# Altium PCB 0011_ESP32_PSU.PcbDoc
Units mil, origin at the board's own origin, x right, y up, seen from the top; angles counter-clockwise.
Board outline 3000 x 3100 mil, 4 copper layers (Top Layer, Signal Layer 1, Signal Layer 2, Bottom Layer), stack 64.6 mil thick; 42 components, 42 nets, 191 pads, 336 vias.
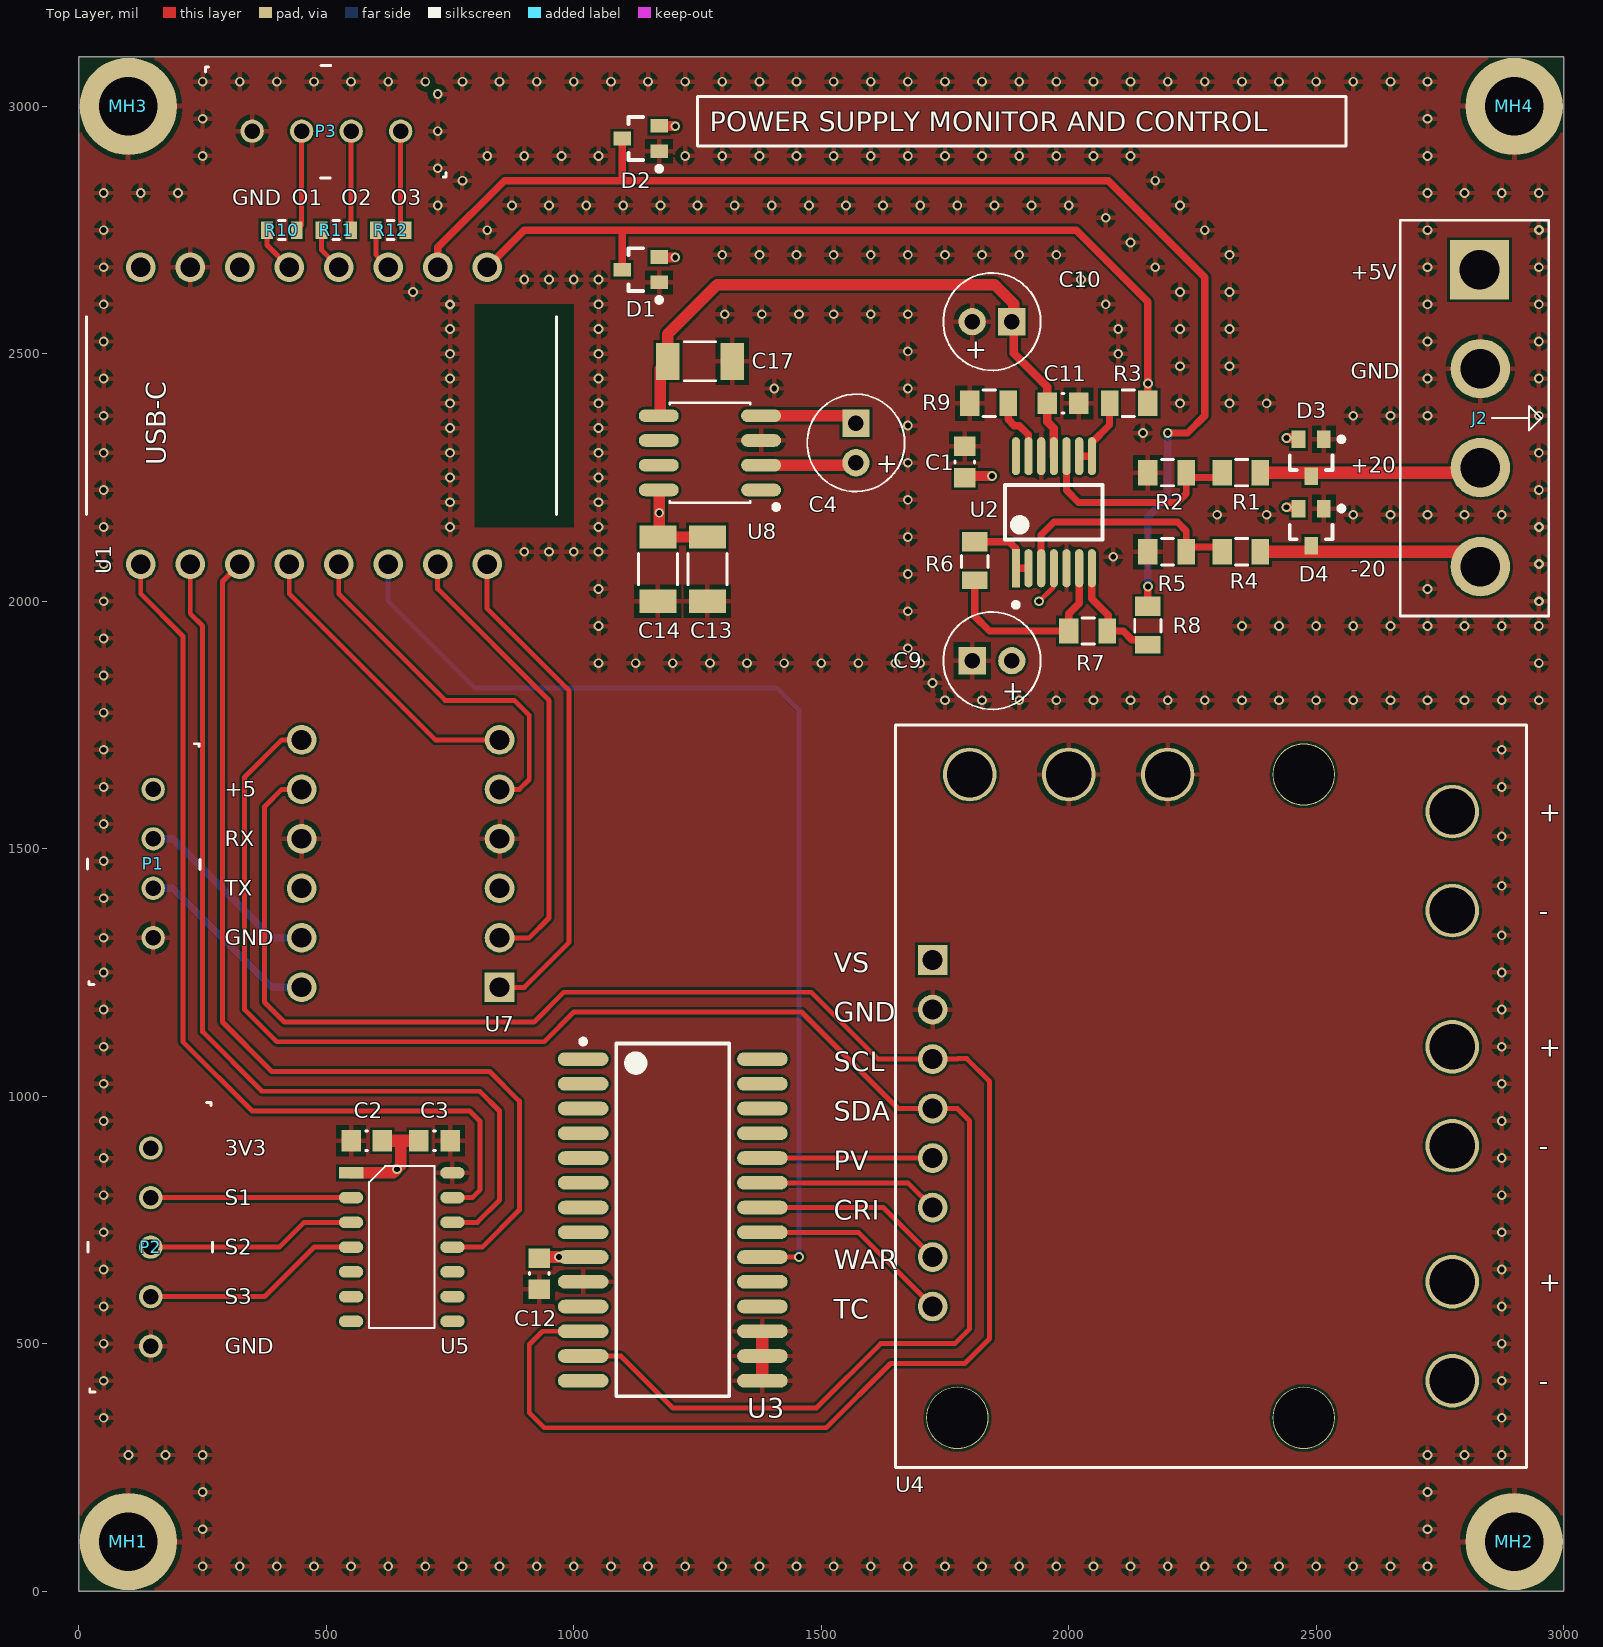
[diagram p0: Top Layer view]
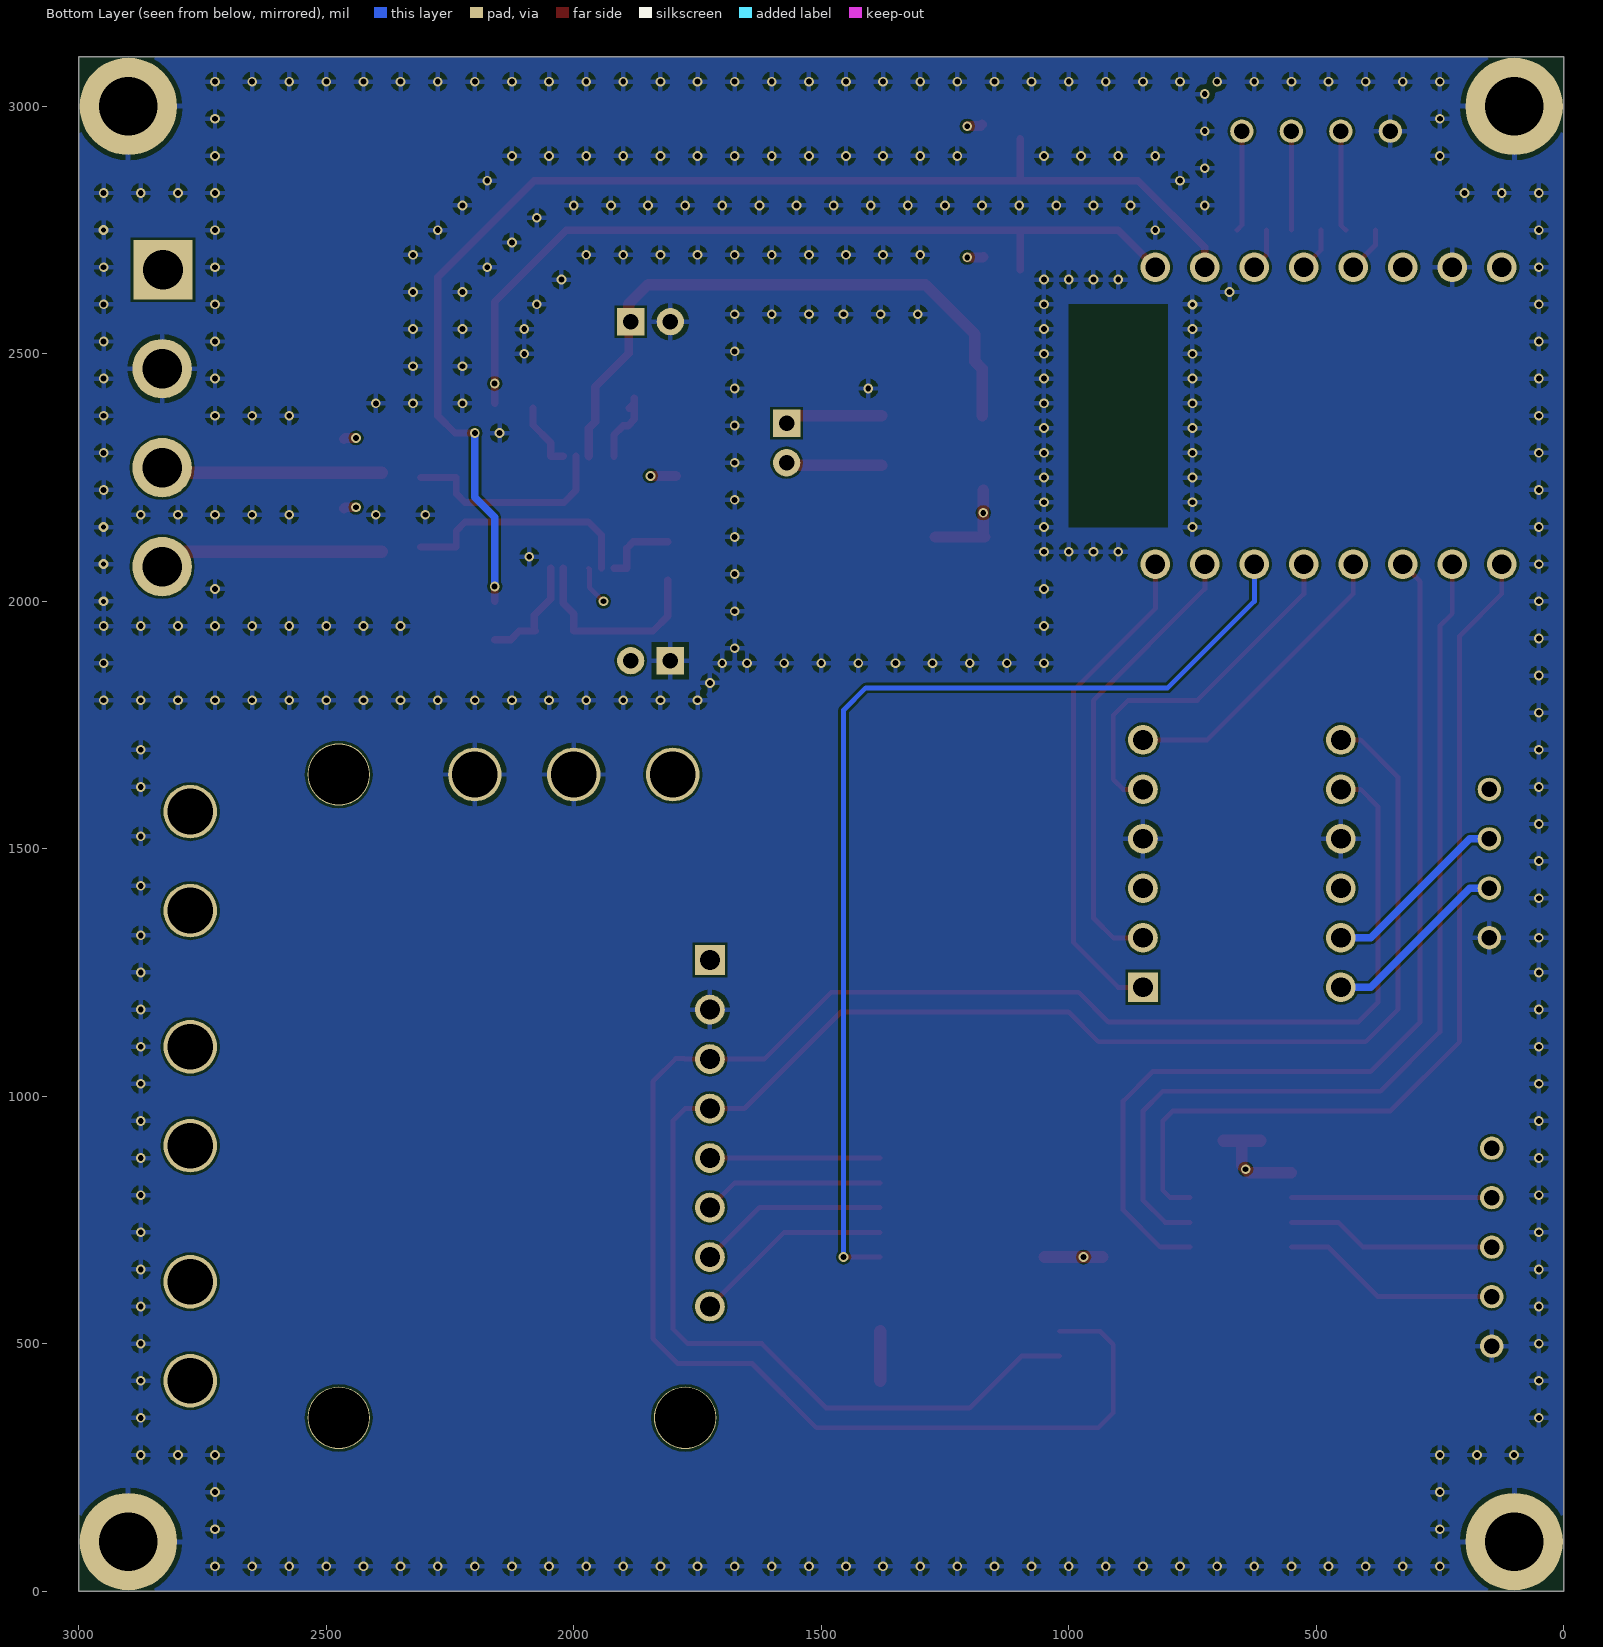
[diagram p1: Bottom Layer view, seen from below]
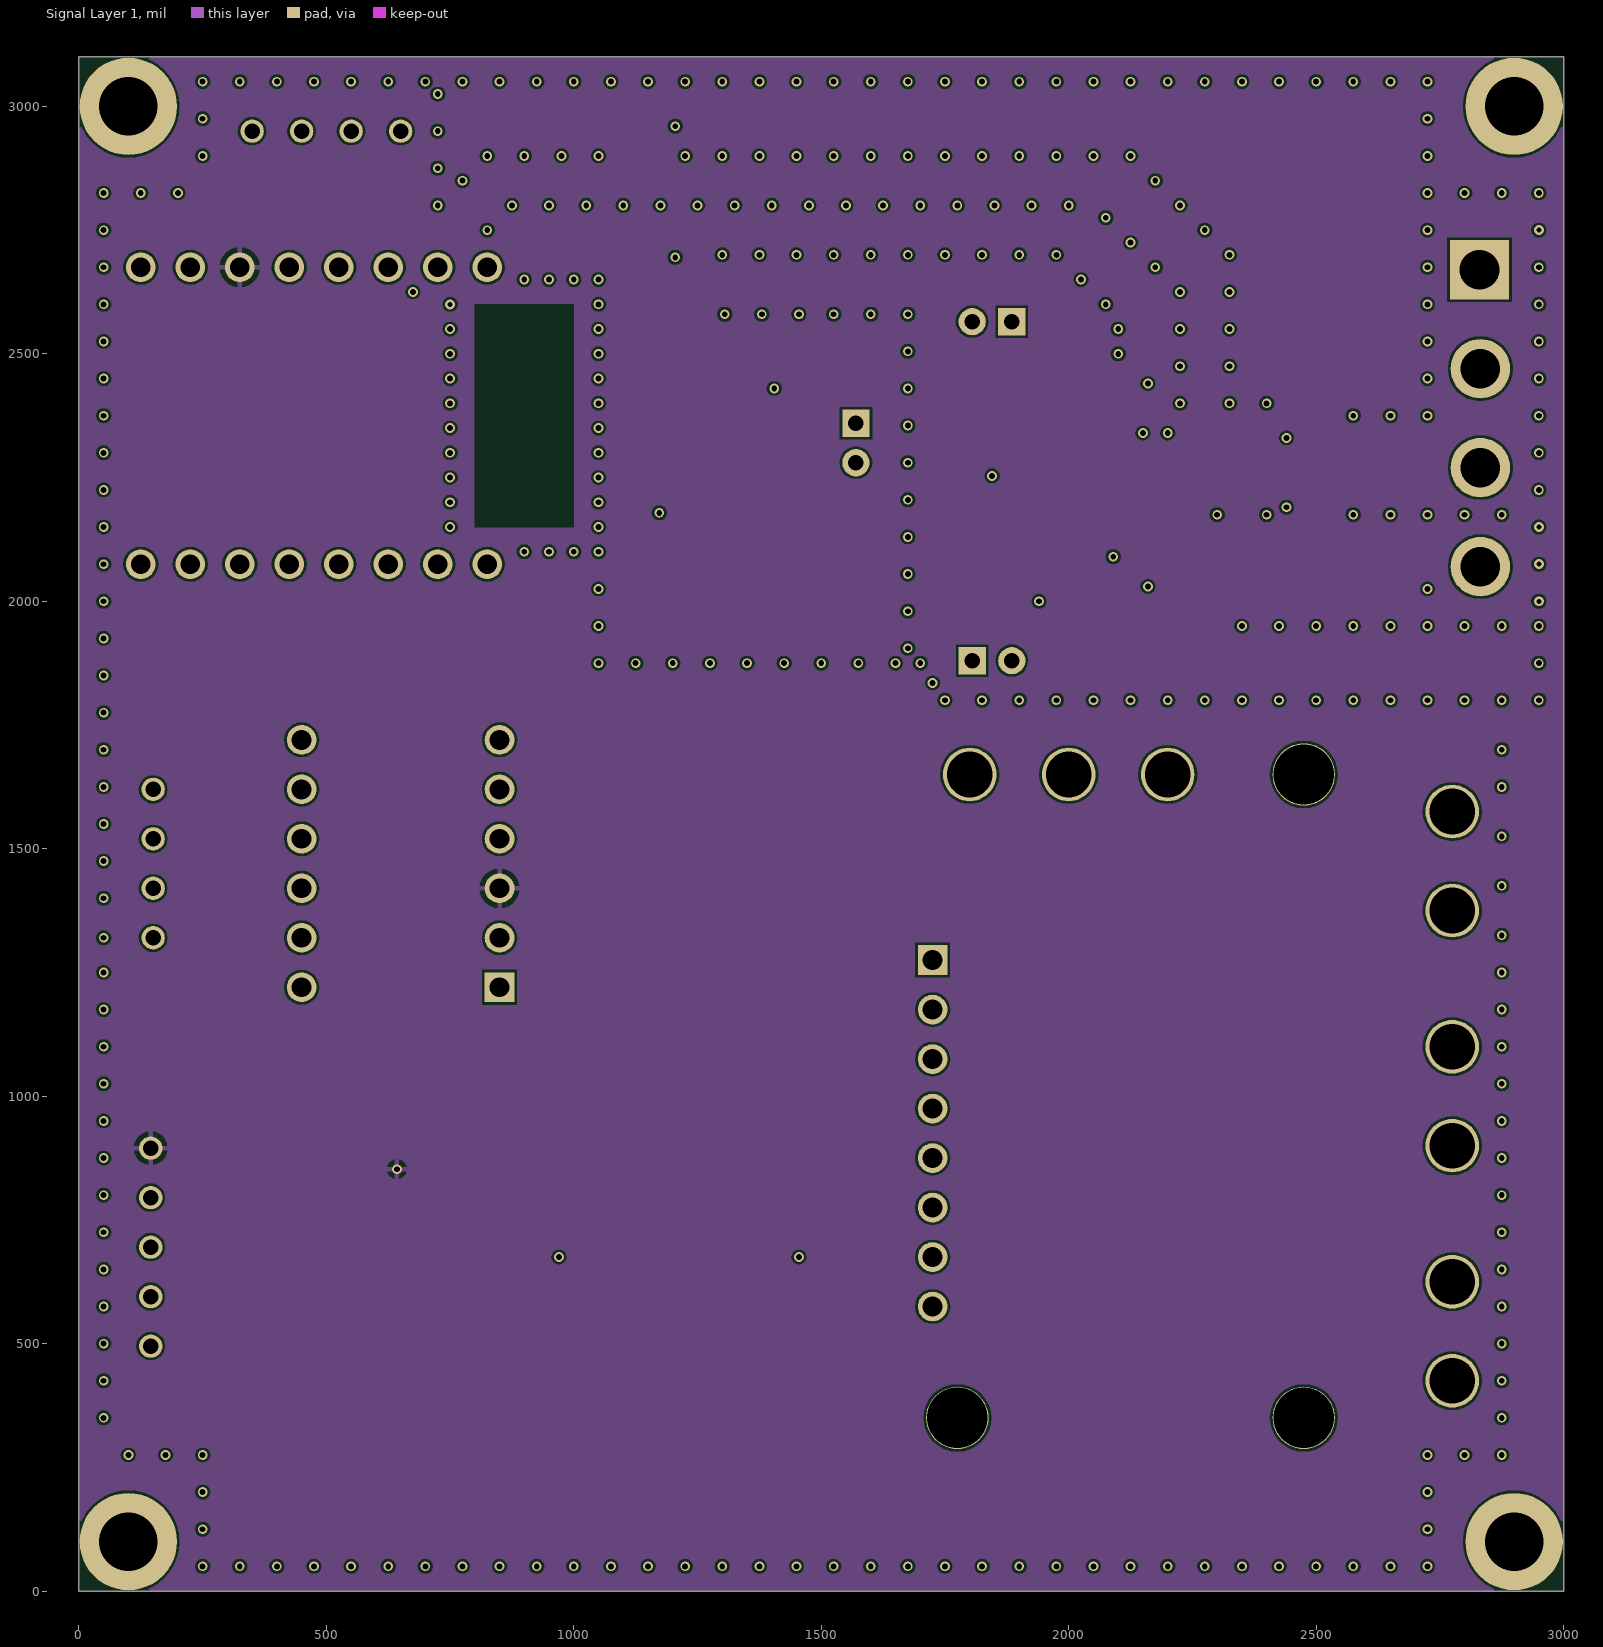
[diagram p2: Signal Layer 1]
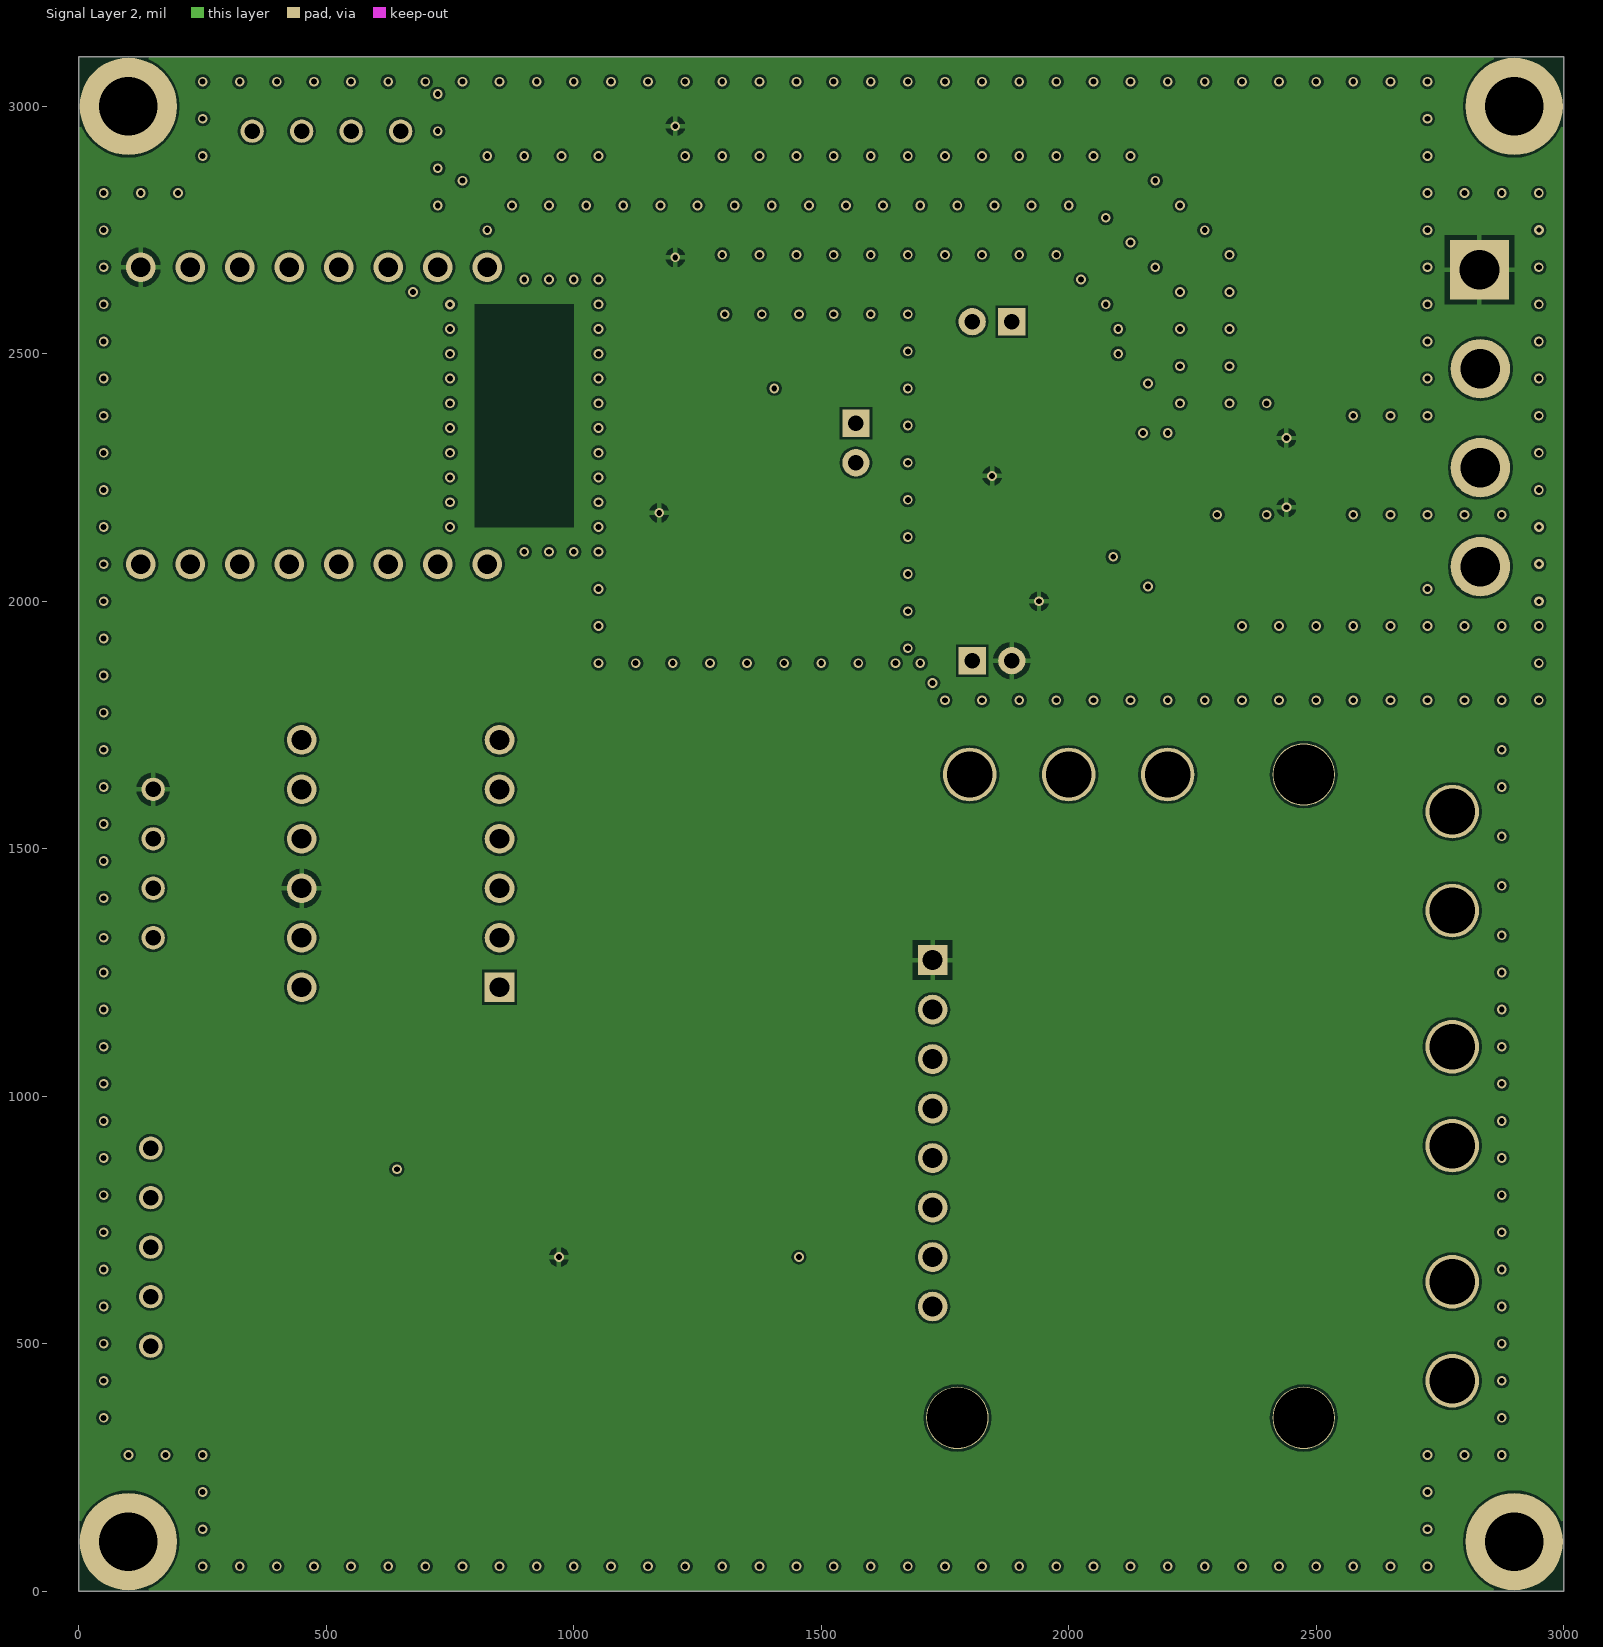
[diagram p3: Signal Layer 2]
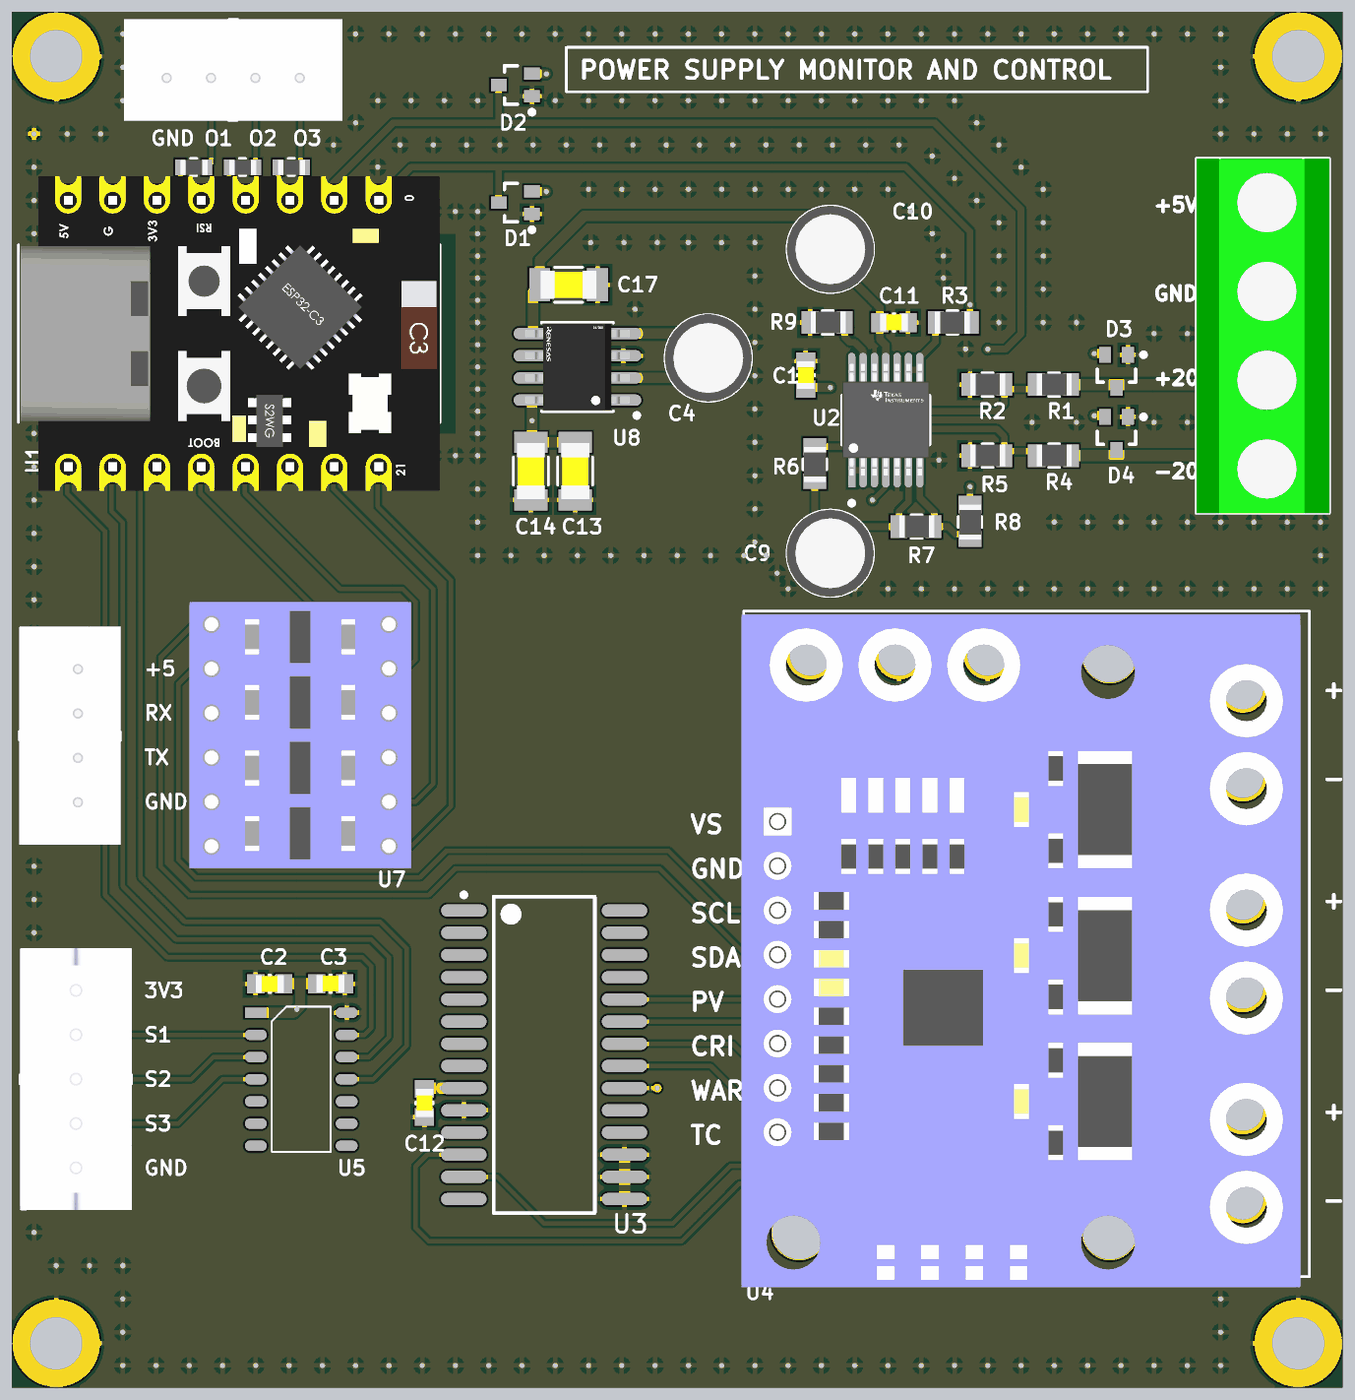
[diagram p4: 3D render of the assembled board from above, using the file's embedded part models]

## Layer stack, top to bottom
Top Solder: solder mask 1, Solder Resist, Dk 3.5
Top Layer: signal copper 1.4
Dielectric 1: prepreg 6.7, FR-4, Dk 4.2
Signal Layer 1: signal copper 0.7
Dielectric 2: core 47, FR-4, Dk 4.2
Signal Layer 2: signal copper 0.7
Dielectric 3: prepreg 6.7, FR-4, Dk 4.2
Bottom Layer: signal copper 1.4
Bottom Solder: solder mask 1, Solder Resist, Dk 3.5

## Board outline
0,0 3000,0 3000,3100 0,3100

## Design rules (kind name [scope] priority, off if disabled: settings)
AssemblyTestPointUsage AssemblyTestPointUsage_1 [All] p2:
AssemblyTestpoint AssemblyTestpoint_1 [All] p2: testpointundercomponent=TRUE minsize=40 maxsize=100 preferedsize=60 minholesize=0 maxholesize=40 preferedholesize=32 testpointgrid=1 usegrid=TRUE gridtolerance=0.01 allowsidetop=TRUE allowsidebottom=TRUE
Clearance [All] p1: gap=5 ignorepadtopadclearanceinfootprint=FALSE
Clearance Clearance_1 [All] p2: gap=5 ignorepadtopadclearanceinfootprint=FALSE except(0: Arc-Hole Track-Hole SMDPad-Hole THPad-Hole Via-Hole Fill-Hole Poly-Hole Region-Hole Text-Hole)
ComponentClearance ComponentClearance_1 [All] p2: gap=10 collisioncheckmode=3 verticalgap=10 showdistances=FALSE
DiffPairsRouting DiffPairsRouting_1 [All] p2: maxlimit=10 minlimit=10 mostfreqgap=10 toplayer_minwidth=15 toplayer_maxwidth=15 toplayer_prefwidth=15 midlayer1_minwidth=15 midlayer1_maxwidth=15 midlayer1_prefwidth=15 midlayer2_minwidth=15 midlayer2_maxwidth=15 midlayer2_prefwidth=15 bottomlayer_minwidth=15 bottomlayer_maxwidth=15 bottomlayer_prefwidth=15 maxuncoupledlength=500
FabricationTestPointUsage FabricationTestPointUsage_1 [All] p2: valid=0 allowmultiple=FALSE
FabricationTestpoint FabricationTestpoint_1 [All] p2: side=3 testpointundercomponent=TRUE minsize=40 maxsize=100 preferedsize=60 minholesize=0 maxholesize=40 preferedholesize=32 testpointgrid=1 allowsidetop=TRUE allowsidebottom=TRUE usegrid=TRUE gridtolerance=0.01
FanoutControl Fanout_LCC [IsLCC] p1: bgadir=Out bgaviamode=Centered fanoutstyle=Auto fanoutdirection=Alternating viagrid=1 // Fanout_LCC (Default Rule)
FanoutControl Fanout_BGA [IsBGA] p2: bgadir=Out bgaviamode=Centered fanoutstyle=Auto fanoutdirection=Alternating viagrid=1 // Fanout_BGA (Default Rule)
FanoutControl Fanout_Default [All] p4: bgadir=Out bgaviamode=Centered fanoutstyle=Auto fanoutdirection=Alternating viagrid=1 // Fanout_Default (Default Rule)
FanoutControl Fanout_Small [(CompPinCount < 5)] p5: bgadir=Out bgaviamode=Centered fanoutstyle=Auto fanoutdirection=OutThenIn viagrid=1 // Fanout_Small (Default Rule)
FanoutControl Fanout_BGA_1 [IsBGA] p6: bgadir=Out bgaviamode=Centered fanoutstyle=Auto fanoutdirection=Alternating viagrid=1 // Fanout_BGA (Default Rule)
FanoutControl Fanout_LCC_1 [IsLCC] p7: bgadir=Out bgaviamode=Centered fanoutstyle=Auto fanoutdirection=Alternating viagrid=1 // Fanout_LCC (Default Rule)
FanoutControl Fanout_SOIC_1 [IsSOIC] p8: bgadir=Out bgaviamode=Centered fanoutstyle=Auto fanoutdirection=Alternating viagrid=1 // Fanout_SOIC (Default Rule)
FanoutControl Fanout_Small_1 [(CompPinCount < 5)] p9: bgadir=Out bgaviamode=Centered fanoutstyle=Auto fanoutdirection=OutThenIn viagrid=1 // Fanout_Small (Default Rule)
FanoutControl Fanout_Default_1 [All] p10: bgadir=Out bgaviamode=Centered fanoutstyle=Auto fanoutdirection=Alternating viagrid=1 // Fanout_Default (Default Rule)
Height Height_1 [All] p2: minheight=0 maxheight=1000 prefheight=500
HoleSize HoleSize_1 [All] p2: absolutevalues=TRUE maxlimit=500 minlimit=1 maxpercent=80.000 minpercent=20.000
HoleToHoleClearance HoleToHoleClearance_1 [All] p2: gap=10 allowstackedmicrovias=TRUE
LayerPairs LayerPairs_1 [All] p2: enforce=TRUE
MinimumSolderMaskSliver MinimumSolderMaskSliver_1 [All] p2: minsoldermaskwidth=4
NetAntennae NetAntennae_1 [All] p2: netantennaetolerance=0
PasteMaskExpansion PasteMaskExpansion_1 [All] p2: expansion=0
PlaneClearance PlaneClearance_1 [All] p2: clearance=20
PlaneConnect PlaneConnect_1 [All] p2: planeconnectstyle=Relief reliefexpansion=20 reliefentries=4 reliefconductorwidth=10 reliefairgap=10
PolygonConnect [All] p1: connectstyle=Relief reliefconductorwidth=10 reliefentries=4 polygonreliefangle="90 Angle" airgapwidth=10
PolygonConnect PolygonConnect_1 [All] p2: connectstyle=Relief reliefconductorwidth=10 reliefentries=4 polygonreliefangle="90 Angle" airgapwidth=10
RoutingCorners RoutingCorners_1 [All] p2: cornerstyle=45-Degree minsetback=100 maxsetback=100
RoutingLayers RoutingLayers_1 [All] p2: top layer_v5=TRUE mid layer 1_v5=TRUE mid layer 2_v5=TRUE bottom layer_v5=TRUE
RoutingPriority RoutingPriority_1 [All] p2: routingpriority=0
RoutingTopology RoutingTopology_1 [All] p2: topology=Shortest
RoutingVias [All] p1: holewidth=28 width=50 viastyle="Through Hole" minholewidth=28 minwidth=50 maxholewidth=28 maxwidth=50
RoutingVias RoutingVias_1 [All] p2: holewidth=28 width=50 viastyle="Through Hole" minholewidth=5 minwidth=10 maxholewidth=28 maxwidth=50
ShortCircuit ShortCircuit_1 [All] p2: allowed=FALSE
SilkToBoardRegionClearance SilkToBoardRegionClearance_1 [All] p2:
SilkToSilkClearance SilkToSilkClearance_1 [All] p2: silktosilkclearance=5
SilkToSolderMaskClearance SilkToSolderMaskClearance_1 [IsPad] p2: minsilkscreentomaskgap=4 clearancetoexposedcopper=TRUE
SolderMaskExpansion [All] p1: expansion=4 istentingtop=FALSE
SolderMaskExpansion SolderMaskExpansion_1 [All] p2: expansion=4 istentingtop=FALSE
UnRoutedNet UnRoutedNet_1 [All] p2:
UnpouredPolygon UnpouredPolygon_1 [All] p2:
Width [All] p1: maxlimit=50 minlimit=10 preferedwidth=25
Width Width_1 [All] p2: maxlimit=50 minlimit=5 preferedwidth=25
26 further rules are at their usual default settings.

## Components (designator, comment, footprint, x,y, rotation, side; value= is the part's Value field where it differs from the comment)
C1 "Cap" CAP_0603 1790,2312.99 r270 top value=0.1uF
C2 "Cap" CAP_0603 550,910 r0 top value=0.1uF
C3 "Cap" CAP_0603 750,910 r180 top value=0.001uF
C4 "Cap Pol2" "CAP 2MM LEAD 5MM CAN" 1570,2320 r270 top value=10uF
C9 "Cap Pol2" "CAP 2MM LEAD 5MM CAN" 1845,1880 r0 top value=10uF
C10 "Cap Pol2" "CAP 2MM LEAD 5MM CAN" 1845,2565 r180 top value=10uF
C11 "Cap" CAP_0603 2020,2400 r180 top value=0.1uF
C12 "Cap" CAP_0603 930,610 r90 top value=0.1uF
C13 "Cap" CAP_0805 1270,2000 r90 top value=0.1uF
C14 "Cap" CAP_0805 1170,2000 r90 top value=10uF
C17 "Cap" CAP_0805 1320,2485 r180 top value=10uF
D1 "BAT54SWT1" ONSC-SOT-323-3-419-04_V 1135,2670 r180 top
D2 "BAT54SWT1" ONSC-SOT-323-3-419-04_V 1135,2935 r180 top
D3 "BAT54SWT1" ONSC-SOT-323-3-419-04_V 2490,2290 r270 top
D4 "BAT54SWT1" ONSC-SOT-323-3-419-04_V 2490,2150 r270 top
J2 "HEADER, 5.08mm, 4-WAY, SIL" "5.08MM, 4-WAY HEADER" 2830,2670 r0 top
MH1 "MTG HOLE" "3mm hole 5mm ring" 100,100 r180 top
MH2 "MTG HOLE" "3mm hole 5mm ring" 2900,100 r180 top
MH3 "MTG HOLE" "3mm hole 5mm ring" 100,3000 r180 top
MH4 "MTG HOLE" "3mm hole 5mm ring" 2900,3000 r180 top
P1 "JST 4-WAY" "JST 4-WAY" 150,1620 r0 top
P2 "JST 5-WAY" "JST 5-WAY" 145,895 r0 top
P3 "JST 4-WAY" "JST 4-WAY" 650,2950 r270 top
R1 "Res1" RESISTOR_0805 2350,2260 r0 top value=330KΩ
R2 "Res1" RESISTOR_0805 2200,2260 r0 top value=68KΩ
R3 "Res1" RESISTOR_0805 2120,2400 r180 top value=1KΩ
R4 "Res1" RESISTOR_0805 2350,2100 r0 top value=330KΩ
R5 "Res1" RESISTOR_0805 2200,2100 r0 top value=68KΩ
R6 "Res1" RESISTOR_0805 1810,2080 r270 top value=10KΩ
R7 "Res1" RESISTOR_0805 2040,1940 r0 top value=10KΩ
R8 "Res1" RESISTOR_0805 2160,1950 r270 top value=1KΩ
R9 "Res1" RESISTOR_0805 1840,2400 r0 top value=10KΩ
R10 "Res1" RESISTOR_0603 410,2750 r0 top value=1KΩ
R11 "Res1" RESISTOR_0603 520,2750 r0 top value=1KΩ
R12 "Res1" RESISTOR_0603 630,2750 r0 top value=1KΩ
U1 "ESP32-C3-SUPERMINI" ESP32-C3-SUPERMINI 125,2075 r90 top locked
U2 "LM324PW" FP-PW0014A-IPC_A 1970,2180 r90 top
U3 "MCP23017-E/SO" SOIC-SO28_M 1200,750 r0 top
U4 "INA3221 DEV" INA3221_DEV 1725,1275 r0 top
U5 "LS19-S" SOP14 550,845 r0 top
U7 "LEVEL SHIFTER" "LEVEL SHIFTER, 4-WAY" 850,1220 r180 top
U8 "ICL7660SIBAZT" SOIC127P600X175-8_M8_15_M 1275,2300 r180 top

## Footprints (in the part's own frame and the unit in brackets; to place one, negate y for a bottom-side part, rotate by r counter-clockwise, add the part's x,y. Pads: shape width x height; smd on the part's side, far side on the other; paste and mask are expansions set on the pad)
"3mm hole 5mm ring" [mm] "mounting hole"
  round 5 hole 3: 0(0,0)
"5.08MM, 4-WAY HEADER" [mil]
  rect 120x120 hole 80: 1(0,0)
  round 120 hole 80: 2(1.76,-200) 3(1.76,-400) 4(1.76,-600)
  silkscreen extent -160,-700 140,100, body extent -159,-700 140,100, height 392
"CAP 2MM LEAD 5MM CAN" [mm]
  round 1.4 hole 0.8: 1(1.016,0)
  rect 1.4x1.4 hole 0.8: 2(-1.016,0)
  silkscreen extent -2.5,-2.5 2.5,2.5, body extent -2.51,-2.5 2.5,2.5, height 8
CAP_0603 [mm]
  rect 1x1.1 smd: 1(0,0) 2(1.6,0)
  silkscreen extent 0.75,-0.5 0.85,0.5, body extent 0,-0.51 1.6,0.49, height 0.75
CAP_0805 [mm]
  rect 1.2x1.9 smd: 1(0,0) 2(3.302,0)
  silkscreen extent 0.85,-1 2.45,1, body extent 0.05,-0.8 3.25,0.8, height 1.75
ESP32-C3-SUPERMINI [mil] "ESP32-C3-SUPERMINI"
  round 60 hole 40: 1(0,0) 2(0,-100) 3(0,-200) 4(0,-300) 5(0,-400) 6(0,-500) 7(0,-600) 8(0,-700) 9(600,-700) 10(600,-600) 11(600,-500) 12(600,-400) 13(600,-300) 14(600,-200) 15(600,-100) 16(600,0)
  silkscreen extent 100,-840 500,110, body extent -54,-840 654,105, height 261
FP-PW0014A-IPC_A [mm]
  rect 1.955x0.421 smd paste+0 mask+0: 1(-2.875,1.95)
  rrect100% 1.955x0.421 smd paste+0 mask+0: 2(-2.875,1.3) 3(-2.875,0.65) 4(-2.875,0) 5(-2.875,-0.65) 6(-2.875,-1.3) 7(-2.875,-1.95) 8(2.875,-1.95) 9(2.875,-1.3) 10(2.875,-0.65) 11(2.875,0) 12(2.875,0.65) 13(2.875,1.3) 14(2.875,1.95)
  silkscreen extent -4.88,-2.5 1.4,2.5, body extent -3.18,-2.5 3.22,2.5, height 1.2
INA3221_DEV [mm] "DEV_BOARD_INA3221"
  rect 1.524x1.524 hole 1.016: 1(0,0)
  round 1.524 hole 1.016: 2(0,-2.54) 3(0,-5.08) 4(0,-7.62) 5(0,-10.16) 6(0,-12.7) 7(0,-15.24) 8(0,-17.78)
  round 2.75 hole 2.35: 9(1.905,9.525) 10(6.985,9.525) 11(12.065,9.525) 12(26.67,7.62) 13(26.67,2.54) 14(26.67,-4.445) 15(26.67,-9.525) 16(26.67,-16.51) 17(26.67,-21.59)
  round 3.2 hole 3.1: 18(19.05,9.525) 19(19.05,-23.495) 20(1.27,-23.495)
  silkscreen extent -1.91,-26.04 30.48,12.06, body extent -2.03,-26.63 29.97,11.87, height 6.17
"JST 4-WAY" [mm]
  round 1.2 hole 0.8: 1(0,0) 2(0,-2.54) 3(0,-5.08) 4(0,-7.62)
  silkscreen extent -3.38,-10.01 2.4,2.34, body extent -3.38,-10.08 2.42,2.42, height 7
"JST 5-WAY" [mm]
  round 1.2 hole 0.8: 1(0,0) 2(0,-2.54) 3(0,-5.08) 4(0,-7.62) 5(0,-10.16)
  silkscreen extent -3.22,-12.5 3.17,2.34, body extent -3.21,-12.57 3.19,2.43, height 8.8
"LEVEL SHIFTER, 4-WAY" [mil] "LEVEL SHIFTER, 4-WAY, 12-PIN DIL"
  rect 60x60 hole 40: 1(0,0)
  round 60 hole 40: 2(0,-100) 3(0,-200) 4(0,-300) 5(0,-400) 6(0,-500) 7(400,-500) 8(400,-400) 9(400,-300) 10(400,-200) 11(400,-100) 12(400,0)
  body extent -50,-550 450,50, height 218
ONSC-SOT-323-3-419-04_V [mm] "SOT23, 3-Leads, Body 2x1.25mm, Pitch 0.65mm"
  rect 0.9x0.7 smd: 1(-0.95,0.65) 2(-0.95,-0.65) 3(0.95,0)
  silkscreen extent -1.08,-1.1 0.63,1.67, body extent -0.63,-1 0.63,1, height 1
RESISTOR_0603 [mm]
  rect 0.6x0.9 smd: 1(-0.762,0) 2(0.762,0)
  silkscreen extent -0.18,-0.48 0.18,0.5, body extent -0.76,-0.44 0.79,0.41, height 0.45
RESISTOR_0805 [mm]
  rect 1x1.3 smd: 1(-1.016,0)
  rect 0.9x1.3 smd: 2(0.953,0)
  silkscreen extent -0.33,-0.68 0.3,0.67, body extent -1,-0.62 1,0.64, height 0.45
SOIC127P600X175-8_M8_15_M [mm] "SOIC, 8-Leads, Body 4.90x3.90mm, Pitch 1.27mm, IPC Low Density"
  rrect100% 2.05x0.65 smd: 1(-2.625,1.905) 2(-2.625,0.635) 3(-2.625,-0.635) 4(-2.625,-1.905) 5(2.625,-1.905) 6(2.625,-0.635) 7(2.625,0.635) 8(2.625,1.905)
  silkscreen extent -3.53,-2.56 2.06,2.9, body extent -3,-2.45 3,2.45, height 1.75
SOIC-SO28_M [mm] "SOIC, 28-Leads, Body 17.9x7.5mm, Pitch 1.27mm, IPC Low Density"
  oval 2.6x0.7 smd: 1(-4.6,8.255) 2(-4.6,6.985) 3(-4.6,5.715) 4(-4.6,4.445) 5(-4.6,3.175) 6(-4.6,1.905) 7(-4.6,0.635) 8(-4.6,-0.635) 9(-4.6,-1.905) 10(-4.6,-3.175) 11(-4.6,-4.445) 12(-4.6,-5.715) 13(-4.6,-6.985) 14(-4.6,-8.255) 15(4.6,-8.255) 16(4.6,-6.985) 17(4.6,-5.715) 18(4.6,-4.445) 19(4.6,-3.175) 20(4.6,-1.905) 21(4.6,-0.635) 22(4.6,0.635) 23(4.6,1.905) 24(4.6,3.175) 25(4.6,4.445) 26(4.6,5.715) 27(4.6,6.985) 28(4.6,8.255)
  silkscreen extent -4.72,-9.05 2.9,9.28, body extent -3.8,-9.05 3.8,9.05, height 2.65
SOP14 [mm] "SOP14"
  rect 1.25x0.6 smd: 1(0,0)
  oval 1.25x0.6 smd: 2(0,-1.27) 3(0,-2.54) 4(0,-3.81) 5(0,-5.08) 6(0,-6.35) 7(0,-7.62) 8(5.2,-7.62) 9(5.2,-6.35) 10(5.2,-5.08) 11(5.2,-3.81) 12(5.2,-2.54) 13(5.2,-1.27) 14(5.2,0)
  silkscreen extent 0.92,-7.97 4.29,0.35

## Part data
C1 C2 C3 C11 C12 C13 C14 C17: library part "CAP SMD STD", "CAPACITOR, SMD"
C4 C9 C10: library part "CAP 2mm LEAD 5mm CAN", "CAPACITOR, TH, 5MM"
D1 D2 D3 D4: library part CMP-1055-00560-1, "Dual Series Schottky Barrier Diodes, 3-Pin SOT-323, Tape and Reel", Manufacturer="On Semiconductor", ComponentLink1Description="Manufacturer URL", ComponentLink1URL=http://www.onsemi.com/, ComponentLink2Description=Datasheet, ComponentLink2URL=http://www.onsemi.cn/pub_link/Collateral/BAT54SWT1-D.PDF, ComponentLink3Description="Package Specification", ComponentLink3URL=http://www.onsemi.com/pub_link/Collateral/419-04.PDF, Configuration=Dual, DatasheetVersion="Rev. 10", IFSM Max (A)=0.6, Mounting Technology="Surface Mount", PackageDescription="3-Pin Small Outline Transistor, Body 2 x 1.25 mm, Pitch 0.65 mm", PackageReference=SOT-323-3-419-04, PackageVersion="Rev. N, 11/2008", Packing="Tape and Reel", PartNumber=BAT54SWT1, RoHS=FALSE, trr Max (ns)=5
J2: "HEADER, 5.08mm PITCH TH, 4-WAY"
MH1 MH2 MH3 MH4: library part "MOUNTING HOLE", "PAD, 3mm TH, 5mm RING"
P1 P3: library part "HEADER, JST-H, 4-WAY", "HEADER, JST, 4-WAY, 2.54mm TH"
P2: library part "HEADER, JST-H, 5-WAY", "HEADER, JST, 5-WAY, 2.54mm TH"
R1 R2 R3 R4 R5 R6 R7 R8 R9 R10 R11 R12: library part "RESISTOR, SMD, STANDARD", "RESISTOR, SMD, STD SIZES"
U1: library part "ESP32-C2 SUPER MINI", "DEV MODULE, ESP32-C3-SUPER MINI"
U2: library part CMP-04895-000008-1, "IC OPAMP GP 4 CIRCUIT 14TSSOP", Ambient Temperature Range High=+70°C, Ambient Temperature Range Low=0°C, Input Bias Current=-0.02uA, Input Offset Voltage=3mV, Manufacturer="Texas Instruments", Max Dual Supply Voltage=16V, Max Junction Temp=+150°C, Max Supply Voltage=32V, Min Dual Supply Voltage=1.5V, Min Supply Voltage=3V, Nominal Supply Current=0.7-1.4mA, Output Current per Channel=20mA, Package=PW0014A, Temperature="0°C to +70°C", Voltage Gain=100V/mV, Automotive=No, Category=IC, ComponentLink2Description=Datasheet, ComponentLink2URL=http://www.ti.com/lit/ds/symlink/lm324.pdf, Device Class L1="Integrated Circuits (ICs)", Device Class L2="Linear ICs", Device Class L3="Amplifiers - Op Amps", Digikey Description="IC OPAMP GP 4 CIRCUIT 14TSSOP", Gain Bandwidth=1.2MHz, Height=1.2mm, Ipc Land Pattern Name=SOP65P640X120-14, Lead Free=Yes, Manufacturer Part Number=LM324PW, Mouser Description="Operational Amplifiers - Op Amps Quad General-Purpose Op Amp", Number Of Channels=4, Octopart=https://octopart.com/lm324pw-texas+instruments-1176274, RoHS=TRUE, Standoff Height=0.05mm, Temperature Range High=+70°C, Temperature Range Low=0°C
U3: library part CMP-0186-00161-2, "16-Bit I/O Expander with Serial Interface, 28-Pin SOIC, Extended Temperature", Code_JEDEC=MS-013, ComponentLink1Description="Manufacturer URL", ComponentLink1URL=http://www.microchip.com/, ComponentLink2Description=Datasheet, ComponentLink2URL=http://ww1.microchip.com/downloads/en/DeviceDoc/21952b.pdf, ComponentLink3Description="Package Specification", ComponentLink3URL=http://www.microchip.com/stellent/groups/techpub_sg/documents/packagingspec/en012702.pdf, DatasheetVersion="revB, Feb-2007", PackageDescription="28-Lead Plastic Small Outline (SO) - Wide 7.50mm Body [SOIC]", PackageReference=SOIC-SO28, PackageVersion="revBB, Aug-2009", RevisionNote="URLs added."
U4: library part DEV_BOARD_INA3221
U5: library part "LS19-S, DEBOUNCE, 6-CH", "IC, LS19-S, DEBOUNCE, 6-CH"
U7: library part "LEVEL SHIFTER 4-WAY", "LEVEL SHIFTER, 4-WAY, 12-PIN DIL"
U8: library part CMP-13561-000001-3, "Inverting RoHS Compliant Adjustable DUAL Switching Regulator IC 85C 35kHz 180muA 4mm", Case/Package=SOIC, Manufacturer Lifecycle Status=ACTIVE, Max Input Voltage=12V, Max Operating Temperature=85°C, Max Output Current=45mA, Max Output Voltage=22.8V, Max Supply Current=180µA, Min Operating Temperature=-40°C, Min Output Voltage=1.5V, Nominal Supply Current=80µA, Output Voltage=-12V, Switching Frequency=35kHz, ComponentLink1Description="Manufacturer's Website", ComponentLink1URL=http://www.renesas.com, ComponentLink2Description="Datasheet URL", ComponentLink2URL=https://octopart.com/cad-content/api/get-model-datasheet/15189/88252503, ComponentLink3Description="Manufacturer's Package Drawing", ComponentLink3URL=https://www.renesas.com/en/document/psc/m815-8-lead-narrow-body-small-outline-plastic-package, Contact Plating=Tin, Export Control Classification Number (ECCN) Code=EAR99, Height=0m, HelpURL=https://octopart.com/cad-content/api/get-model-datasheet/15189/88252503, Lead Free="Lead Free", Length=4.9mm, Lifecycle Status=Production, Logic Function=Inverting, Max Supply Voltage=12V, Min Supply Voltage=1.5V, Mount="Surface Mount", Number Of Channels=1, Number of Outputs=1, Number of Pins=8, Output Current=45mA, Output Type=Adjustable, Pitch=1.3mm, Radiation Hardening=No, RoHS=Compliant, Synchronous Rectifier=No, Topology="Charge Pump", Width=3.9mm

## Via types
v1: diameter 19.68, hole 11.81, Top Layer to Bottom Layer, tented both sides, 328 vias
v2: diameter 20, hole 10, Top Layer to Bottom Layer, 5 vias
v3: diameter 19.68, hole 11.81, Top Layer to Bottom Layer, 3 vias

## Nets (pads, with @x,y where several pads share a name; then routed paths per layer and width w, separated by ;. In a path a pad name is that pad's centre, name@x,y a point inside that pad or via, vN(x,y) a via of type N, cw(c..) or ccw(c..) an arc to the next point about the centre after c; other vN are vias at no path point)
3V3: C2.2 C3.2 P2.1 U1.14 U5.1 U7.3 | length 230.2
  Top Layer w23: U5.1 635,845 650,860 650,910
  Top Layer w25: C2.2 650,910 C3.2
  other v1: 642.5,852.5
+5: C1.2 C9.1 C12.2 C13.2 C14.2 D1.2 D2.2 D3.2 D4.2 J2.1 P1.1 U1.16 U2.4 U3.9 U4.1 U7.10 U8.8 | length 556.7
  Top Layer w10: v1(1940,2000) 1940.75,2000 1968.74,2027.99 1968.74,2065.54 U2.4
  Top Layer w20: D1.2 1172.99,2695 v1(1205,2695) ; D2.2@1175,2963.19 1178.19,2960 v1(1205,2960) ; C1.2@1792.99,2252.99 1793.42,2253.42 v1(1845.21,2253.42) ; v1(2440,2190) 2461.81,2190 D4.2 ; v1(2440,2330) 2461.81,2330 D3.2
  Top Layer w23: C14.2 C13.2 ; C14.2@1172.64,2132.36 v1(1172.64,2178.68) U8.8@1172.64,2225
  Top Layer w25: C12.2@932.01,675 U3.9@1048.9,675
  other v3: 970,675
-2.5V_OUT: R6.1 U2.1 U2.2 | length 154.3
  Top Layer w15: R6.1 1880,2120 1893.23,2106.77 U2.1 U2.2
-5: C10.2 C11.2 C17.2 U2.11 U8.5 | length 1269.1
  Top Layer w17: C10.2@1889.21,2570 1889.21,2500.79 1957.01,2432.99 1957.01,2362.28 1970,2349.28 U2.11
  Top Layer w23: U8.5@1175,2375 1175,2470 C17.2 1190,2540 1290,2640 1850,2640 1889.21,2600.79 C10.2@1889.21,2570
ALM: U1.6 U3.20 | length 2175
  Top Layer w10: U3.20 v3(1455,675)
  Bottom Layer w10: U1.6 625,2000 800,1825 1410,1825 1455,1780 v3(1455,675)
CRI: U3.23 | length 364.6
  Top Layer w10: U3.23 1675,825 1725,775
GND: C1.1 C2.1 C3.1 C9.2 C10.1 C11.1 C12.1 C13.1 C14.1 C17.1 D1.1 D2.1 D3.1 D4.1 J2.2 MH1.0 MH2.0 MH3.0 MH4.0 P1.4 P2.5 P3.4 R2.1 R5.1 R9.1 U1.15 U2.5 U2.12 U3.10 U3.15 U3.16 U3.17 U4.2 U4.10 U4.11 U5.14 U7.4 U7.9 U8.3 | length 100
  Top Layer w25: U3.15 U3.16 U3.17
  other v1: 250,50 325,50 400,50 475,50 550,50 625,50 700,50 775,50 850,50 925,50 1000,50 1075,50 1150,50 1225,50 1300,50 1375,50 1450,50 1525,50 1600,50 1675,50 1750,50 1825,50 1900,50 1975,50 2050,50 2125,50 2200,50 2275,50 2350,50 2425,50 2500,50 2575,50 2650,50 2725,50 250,125 2725,125 250,200 2725,200 100,275 175,275 250,275 2725,275 2800,275 2875,275 50,350 2875,350 50,425 2875,425 50,500 2875,500 50,575 2875,575 50,650 2875,650 50,725 2875,725 50,800 2875,800 50,875 2875,875 50,950 2875,950 50,1025 2875,1025 50,1100 2875,1100 50,1175 2875,1175 50,1250 2875,1250 50,1320 2875,1325 50,1400 2875,1425 50,1475 2875,1525 50,1550 50,1625 2875,1625 50,1700 2875,1700 50,1775 1750,1800 1825,1800 1900,1800 1975,1800 2050,1800 2125,1800 2200,1800 2275,1800 2350,1800 2425,1800 2500,1800 2575,1800 2650,1800 2725,1800 2800,1800 2875,1800 2950,1800 1725,1835 50,1850 1050,1875 1125,1875 1200,1875 1275,1875 1350,1875 1425,1875 1500,1875 1575,1875 1650,1875 1700,1875 2950,1875 1675,1905 50,1925 1050,1950 2350,1950 2425,1950 2500,1950 2575,1950 2650,1950 2725,1950 2800,1950 2875,1950 2950,1950 1675,1980 50,2000 1050,2025 2725,2025 1675,2055 50,2075 2090,2090 900,2100 950,2100 1000,2100 1050,2100 1675,2130 50,2150 750,2150 1050,2150 2300,2175 2400,2175 2575,2175 2650,2175 2725,2175 2800,2175 2875,2175 750,2200 1050,2200 1675,2205 50,2225 2950,2225 750,2250 1050,2250 1675,2280 50,2300 750,2300 1050,2300 2950,2300 2150,2340 750,2350 1050,2350 1675,2355 50,2375 2575,2375 2650,2375 2725,2375 2950,2375 750,2400 1050,2400 2225,2400 2325,2400 2400,2400 1405,2430 1675,2430 50,2450 750,2450 1050,2450 2725,2450 2950,2450 2225,2475 2325,2475 750,2500 1050,2500 2100,2500 1675,2505 50,2525 2725,2525 2950,2525 750,2550 1050,2550 2100,2550 2225,2550 2325,2550 1305,2580 1380,2580 1455,2580 1525,2580 1600,2580 1675,2580 50,2600 1050,2600 2075,2600 2725,2600 2950,2600 675,2625 2225,2625 2325,2625 900,2650 950,2650 1000,2650 1050,2650 2025,2650 50,2675 2175,2675 2725,2675 2950,2675 1300,2700 1375,2700 1450,2700 1525,2700 1600,2700 1675,2700 1750,2700 1825,2700 1900,2700 1975,2700 2325,2700 2125,2725 50,2750 825,2750 2275,2750 2725,2750 2075,2775 725,2800 875,2800 950,2800 1025,2800 1100,2800 1175,2800 1250,2800 1325,2800 1400,2800 1475,2800 1550,2800 1625,2800 1700,2800 1775,2800 1850,2800 1925,2800 2000,2800 2225,2800 125,2825 200,2825 2725,2825 2800,2825 2875,2825 2950,2825 775,2850 2175,2850 725,2875 250,2900 825,2900 900,2900 975,2900 1050,2900 1225,2900 1300,2900 1375,2900 1450,2900 1525,2900 1600,2900 1675,2900 1750,2900 1825,2900 1900,2900 1975,2900 2050,2900 2125,2900 2725,2900 725,2950 250,2975 2725,2975 725,3025 250,3050 325,3050 400,3050 475,3050 550,3050 625,3050 700,3050 775,3050 850,3050 925,3050 1000,3050 1075,3050 1150,3050 1225,3050 1300,3050 1375,3050 1450,3050 1525,3050 1600,3050 1675,3050 1750,3050 1825,3050 1900,3050 1975,3050 2050,3050 2125,3050 2200,3050 2275,3050 2350,3050 2425,3050 2500,3050 2575,3050 2650,3050 2725,3050
  other v2: 2950,2000 2950,2075 2950,2150 750,2600 2950,2750
  other v3: 50,2825
IN+: D3.3 J2.3 R1.2 | length 448.4
  Top Layer w25: R1.2 2821.76,2260 J2.3
IN-: D4.3 J2.4 R4.2 | length 456.7
  Top Layer w25: R4.2 2801.76,2100 J2.4
NetC4_1: C4.1 U8.2 | length 192.6
  Top Layer w23: U8.2@1377.36,2275 C4.1@1570,2275
NetC4_2: C4.2 U8.4 | length 198.9
  Top Layer w23: U8.4@1377.36,2375 1555,2375 C4.2
NetR1_1: R1.1 R2.2 U2.10 | length 433.1
  Top Layer w14: U2.10 1995.59,2224.41 2020,2200 2220,2200 2237.5,2217.5 2237.5,2250 R1.1@2310,2250
NetR3_2: R3.2 U2.8 U2.9 | length 137.2
  Top Layer w15: U2.9 U2.8 2046.77,2320.52 2082.5,2356.25 R3.2@2082.5,2390
NetR4_1: R4.1 R5.2 U2.3 | length 483.6
  Top Layer w14: U2.3 1944.41,2134.41 1970,2160 2220,2160 2237.5,2142.5 2237.5,2110 R4.1@2310,2110
NetR6_2: R6.2 R7.1 U2.6 | length 410.5
  Top Layer w15: R6.2 1810,1970 1840,1940 R7.1 2000,1975 2021.18,1996.18 U2.6
NetR7_2: R7.2 R8.2 U2.7 | length 231.3
  Top Layer w15: U2.7 2046.77,2005 2080,1971.77 2080,1942.5 R7.2 2110,1940 2127.5,1922.5 R8.2@2160,1922.5
NetR9_2: R9.2 U2.13 | length 156
  Top Layer w10: U2.13@1917.56,2294.46 U2.13
  Top Layer w15: R9.2@1877.5,2410 R9.2 ; R9.2@1887.72,2389.78 R9.2 ; U2.13 1918.82,2336.18 1900,2355 1890,2355 1877.5,2367.5 R9.2
O1: R12.1 U1.11 | length 85.4
  Top Layer w10: R12.1 600,2700 U1.11
O2: R11.1 U1.12 | length 89.5
  Top Layer w10: R11.1 490,2710 U1.12
O3: R10.1 U1.13 | length 93.6
  Top Layer w10: R10.1 380,2720 U1.13
OP1: P3.1 R12.2 | length 204.1
  Top Layer w10: P3.1 650,2760 R12.2
OP2: P3.2 R11.2 | length 200
  Top Layer w10: R11.2 P3.2
OP3: P3.3 R10.2 | length 204.1
  Top Layer w10: R10.2 450,2760 P3.3
PV: U3.24 | length 343.9
  Top Layer w10: U3.24 1725,875
RX: U1.7 U7.2 | length 924.8
  Top Layer w10: U1.7 725,2025 950,1800 950,1360 910,1320 U7.2
RX_H: P1.2 U7.11 | length 382.8
  Bottom Layer w15: P1.2 190,1520 390,1320 U7.11
S1: U1.1 U5.13 | length 1868
  Top Layer w10: U1.1 125,2015 210,1930 210,1110 350,970 790,970 810,950 810,810 795,795 U5.13
S2: U1.2 U5.12 | length 1915.5
  Top Layer w10: U1.2 225,1975 250,1950 250,1130 370,1010 810,1010 850,970 850,790 805,745 U5.12
S3: U1.3 U5.11 | length 1992.1
  Top Layer w10: U1.3 290,2040 290,1150 390,1050 830,1050 890,990 890,770 815,695 U5.11
SCL_H: U3.12 U4.3 U7.8 | length 3861.5
  Top Layer w10: U7.8 410,1620 375,1585 375,1190 415,1150 920,1150 980,1210 1480,1210 1615,1075 U4.3 1775.69,1075 1776.55,1075.86 1794.14,1075.86 1840,1030 1840,510 1790,460 1640,460 1510,330 940,330 910,360 910,498.37 936.63,525 U3.12
SCL_L: U1.5 U7.5 | length 744.8
  Top Layer w10: U1.5 525,2015 740,1800 880,1800 910,1770 910,1640 890,1620 U7.5
SDA_H: U3.13 U4.4 U7.7 | length 3534.8
  Top Layer w10: U7.7 410,1720 335,1645 335,1175 400,1110 940,1110 1000,1170 1460,1170 1655,975 U4.4 1775,975 1800,950 1800,530 1770,500 1620,500 1490,370 1200,370 1095,475 U3.13
SDA_L: U1.4 U7.6 | length 607.2
  Top Layer w10: U1.4 425,2015 720,1720 U7.6
SW1: P2.2 U5.2 | length 405
  Top Layer w10: P2.2 U5.2
SW2: P2.3 U5.3 | length 425.7
  Top Layer w10: P2.3 405,695 455,745 U5.3
SW3: P2.4 U5.4 | length 446.4
  Top Layer w10: P2.4 375,595 475,695 U5.4
TC: U3.21 | length 406
  Top Layer w10: U3.21 1575,725 1725,575
TX: U1.8 U7.1 | length 1010.6
  Top Layer w10: U1.8 825,1985 990,1820 990,1310 900,1220 U7.1
TX_H: P1.3 U7.12 | length 382.8
  Bottom Layer w15: P1.3 190,1420 390,1220 U7.12
V+: D1.3 R3.1 U1.9 | length 1708.5
  Top Layer w15: U1.9 900,2750 2015,2750 2160,2605 v1(2160,2440) R3.1 ; D1.3 1097.6,2747.4
V-: D2.3 R8.1 U1.10 | length 2535.2
  Top Layer w15: U1.10 725,2715 860,2850 2080,2850 2275,2655 2275,2375 2240,2340 v1(2200,2340) ; 1097.6,2852.6 D2.3 ; R8.1@2160,2000 v1(2160,2030)
  Bottom Layer w15: v1(2160,2030) 2160,2170 2200,2210 v1(2200,2340)
WAR: U3.22 | length 385.3
  Top Layer w10: U3.22 1625,775 1725,675
pads on no net: U2.14 U3.1 U3.2 U3.3 U3.4 U3.5 U3.6 U3.7 U3.8 U3.11 U3.14 U3.18 U3.19 U3.25 U3.26 U3.27 U3.28 U4.5 U4.6 U4.7 U4.8 U4.9 U4.12 U4.13 U4.14 U4.15 U4.16 U4.17 U4.18 U4.19 U4.20 U5.5 U5.6 U5.7 U5.8 U5.9 U5.10 U8.1 U8.6 U8.7

## Polygon pours and split planes (outlines as drawn)
+5 on Signal Layer 2 "Signal Layer 1-No Net" (solid, pour order 8): 0,0 0,3100 3000,3100 3000,0
3V3 on Signal Layer 1 "Signal Layer 1-No Net" (solid, pour order 7): 0,0 0,3100 3000,3100 3000,0
GND on Bottom Layer "Signal Layer 1-No Net" (solid, pour order 5): 0,0 0,3100 3000,3100 3000,0
GND on Top Layer "Signal Layer 1-No Net" (solid, pour order 6): 0,0 0,3100 3000,3100 3000,0

## Other copper
Multi-Layer:
  pour cut-out: 800,2600 1000,2600 1000,2150 800,2150

## Silkscreen, mask and mechanical layers (free items; w line width, h text height)
Top Overlay:
  lines w5.91: 1250,2920 1250,3020 2560,3020 2560,2920 1250,2920
  text "POWER SUPPLY MONITOR AND CONTROL" at 1275,2950 h40
  text "GND" at 310,2800 h32
  text "O1" at 430,2800 h32
  text "O2" at 530,2800 h32
  text "O3" at 630,2800 h32
  text "+5V" at 2570,2650 h32
  text "+" at 1790,2490 h40
  text "GND" at 2570,2450 h32
  text "+" at 1610,2260 h40
  text "+20" at 2570,2260 h32
  text "-20" at 2570,2050 h32
  text "+" at 1865,1800 h40
  text "+5" at 295,1605 h32
  text "RX" at 295,1505 h32
  text "TX" at 295,1405 h32
  text "GND" at 295,1305 h32
  text "3V3" at 295,880 h32
  text "S1" at 295,780 h32
  text "S2" at 295,680 h32
  text "S3" at 295,580 h32
  text "GND" at 295,480 h32
Mechanical 1:
  lines w5.91: 3000,1500 3000,3100 0,3100 0,0 3000,0 3000,1700 ; 2700,0 2700,0

## Text inside footprints (layer, text, board x,y; h text height)
U1: Top Overlay "USB-C" at 175,2275 h40 r90
U4: Top Overlay "-" at 2950,405 h40; Top Overlay "+" at 2950,605 h40; Top Overlay "-" at 2950,880 h40; Top Overlay "+" at 2950,1080 h40; Top Overlay "-" at 2950,1355 h40; Top Overlay "+" at 2950,1555 h40; Top Overlay "TC" at 1525,550 h40; Top Overlay "WAR" at 1525,650 h40; Top Overlay "CRI" at 1525,750 h40; Top Overlay "PV" at 1525,850 h40; Top Overlay "SDA" at 1525,950 h40; Top Overlay "SCL" at 1525,1050 h40; Top Overlay "GND" at 1525,1150 h40; Top Overlay "VS" at 1525,1250 h40